# EAGLE board Street_Fighter_v1.2 (EAGLE 7.5.0)
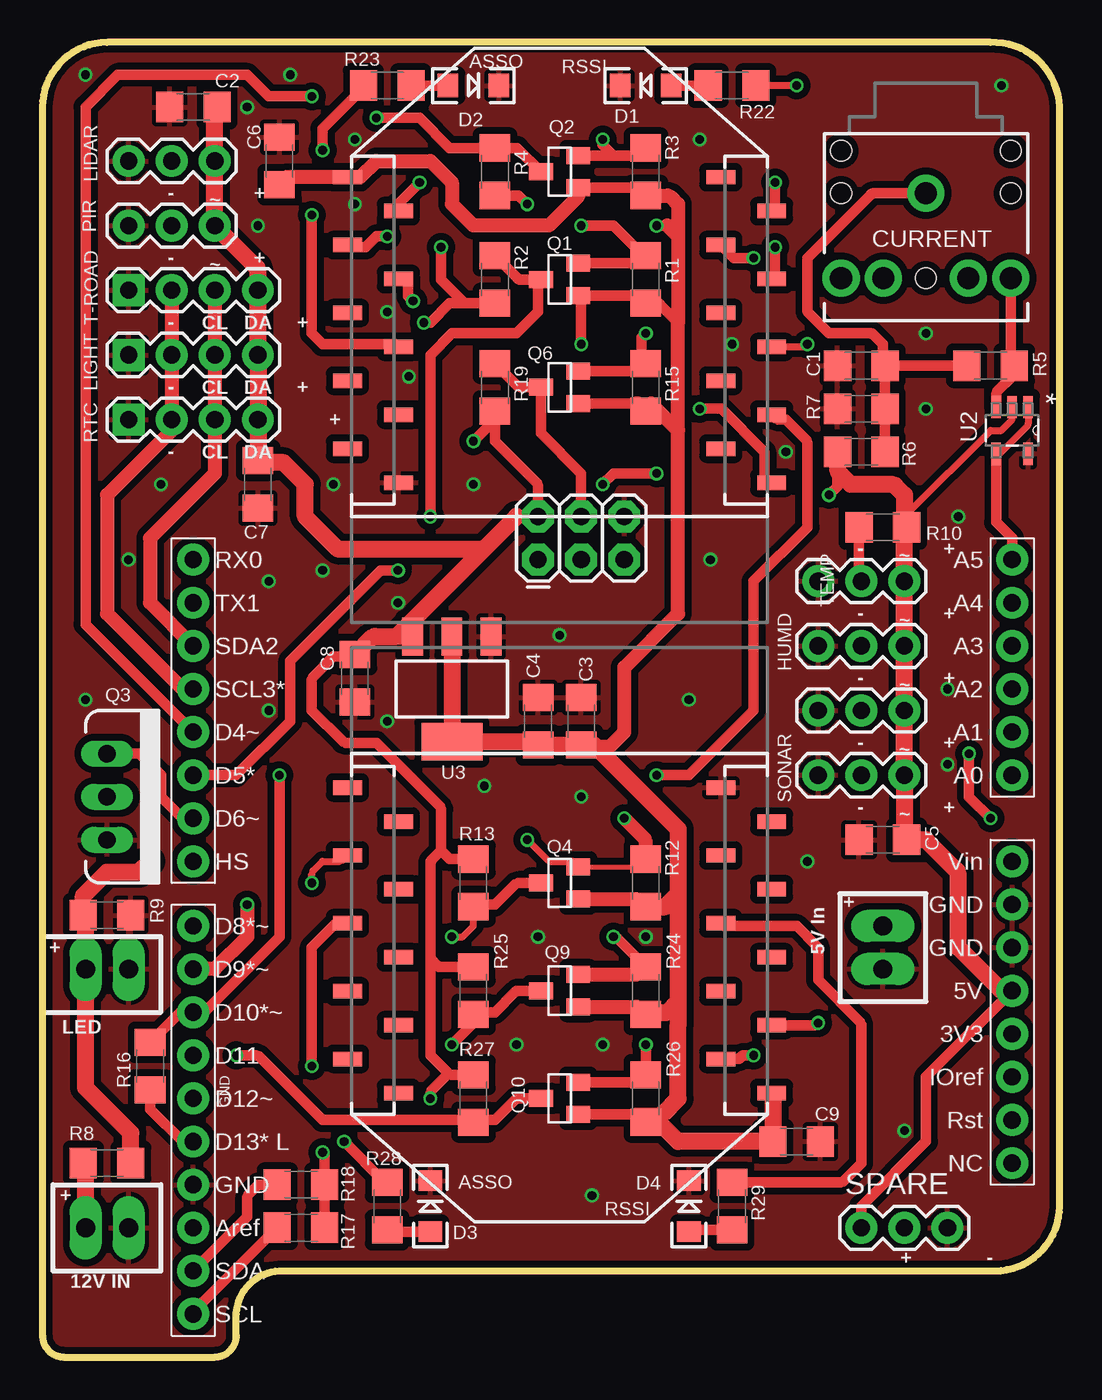
[diagram p0: board, top side]
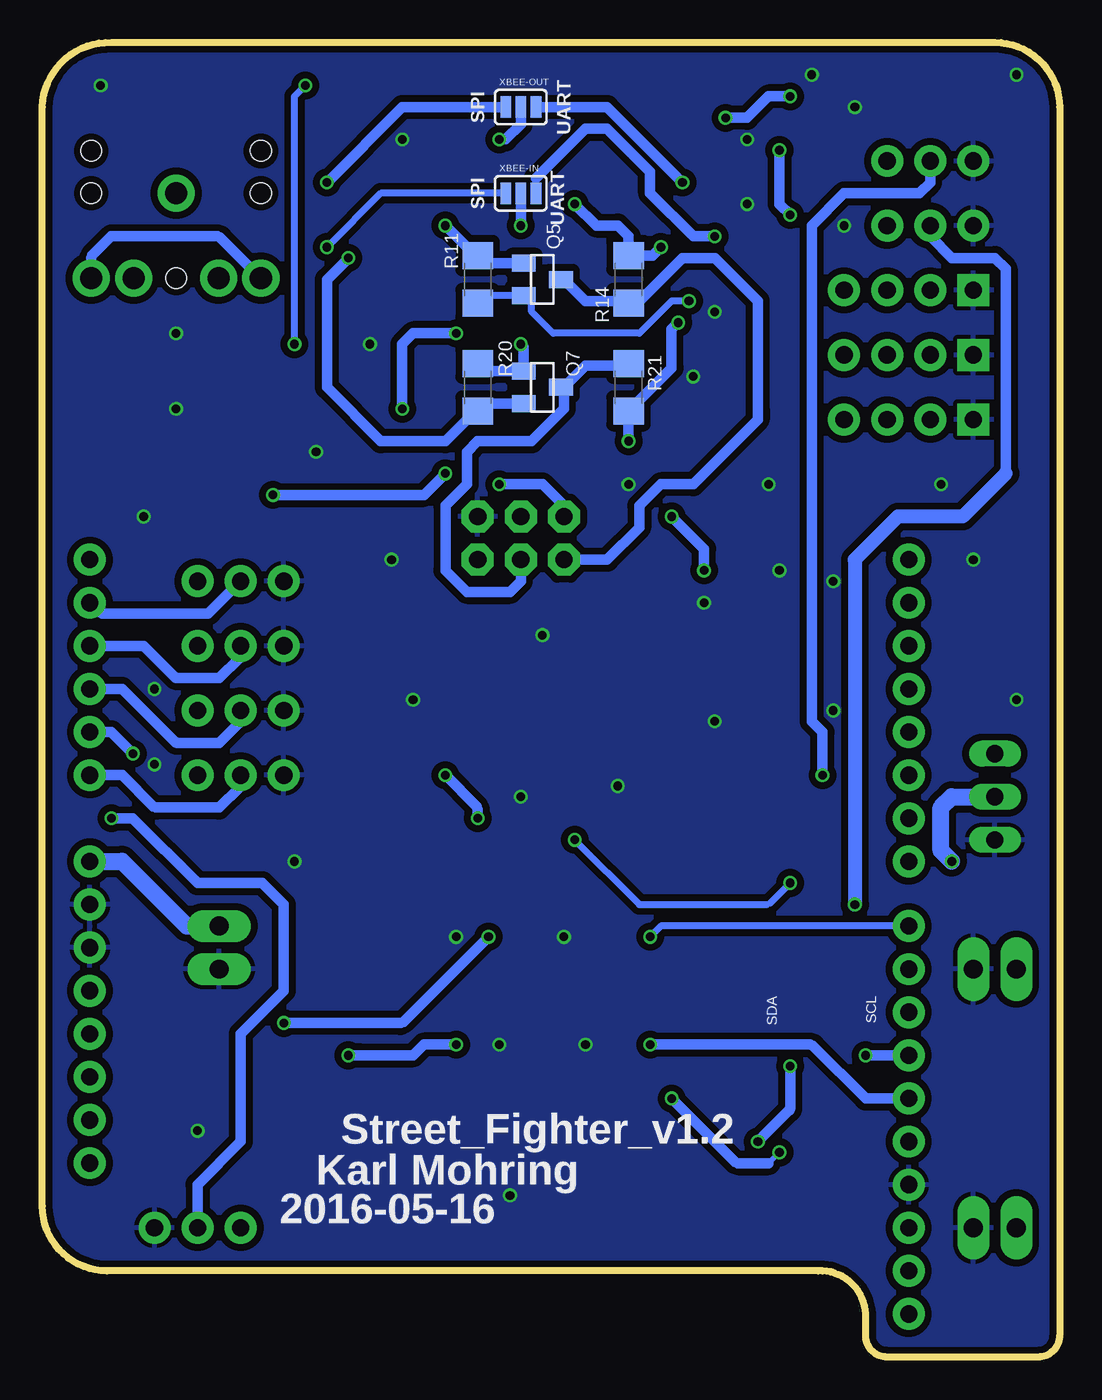
[diagram p1: board, bottom side, seen from below]

Size 59.94 x 77.47 mm. Coordinates in mm from the lower left corner, seen from the top.
Outline: 10.16,0 arc90 11.43,1.27 11.43,2.54 arc-90 14.22,5.08 56.13,5.08 arc90 59.94,8.89 59.94,73.66 arc90 55.88,77.47 3.81,77.47 arc90 0,73.66 0,1.27 arc90 1.27,0 10.16,0
Copper layers (1*16): Top 0.035mm / dielectric 1.5mm / Bottom 0.035mm
Design rules "ITEADstudio_DRC": minimum track width 6mil, minimum drill 12mil, track to track 6mil, track to pad 6mil, pad to pad 6mil, via to via 6mil, smd to smd 0mil, copper to edge 10mil, drill to drill 10mil, minimum pad ring 10mil, minimum via ring 6mil, stop-mask expansion 2mil, vias tented up to drill 100mil, thermal gap 10mil

## Footprints (pad centres in the part's own frame; a part is rotated, then mirrored left to right if it is on the bottom)
1206 = smd 1.6 x 1.8: 1 -1.4,0; 2 1.4,0
AUDIO-JACK = drill 1.3 pad 2.184: RING 5,5; RSH 5,2.5; SLEEVE 0,0; TIP 5,-5; TSH 5,-2.5 | hole 1.2: 0,5; -2.5,5; -2.5,-5; 0,-5; 5,0
LED-1206 = smd 1.2 x 1.4: A -1.5,0; C 1.5,0
1X03 = drill 1.016 pad 1.88: 1 0,0; 2 2.54,0; 3 5.08,0
2X3 = drill 1.016 pad 1.88 octagon: 1 0,0; 2 0,2.54; 3 2.54,0; 4 2.54,2.54; 5 5.08,0; 6 5.08,2.54
1X02_LONGPADS = drill 1.118 pad 1.88 long: 1 0,0; 2 2.54,0
1X04 = drill 1.016 pad 1.88 square: 1 0,0 | drill 1.016 pad 1.88: 2 2.54,0; 3 5.08,0; 4 7.62,0
SOT23 = smd 1 x 1.4: 1 -0.95,-1.1; 2 0.95,-1.1; 3 0,1.1
TO220V = drill 1.016 long: 1 -2.54,0; 2 0,0; 3 2.54,0
DUEMILANOVE_VIAS = drill 1.016 pad 1.88: 0 2.54,41.91; 1 2.54,39.37; 2 2.54,36.83; 2@1 2.54,0; 3 2.54,34.29; 3@1 2.54,-2.54; 3V3 50.8,13.97; 5 2.54,29.21; 5V 50.8,16.51; 6 2.54,26.67; 7 2.54,24.13; 8 2.54,20.32; 9 2.54,17.78; 10 2.54,15.24; 11 2.54,12.7; 12 2.54,10.16; 13 2.54,7.62; A0 50.8,29.21; A1 50.8,31.75; A2 50.8,34.29; A3 50.8,36.83; A4 50.8,39.37; A5 50.8,41.91; AREF 2.54,2.54; D4 2.54,31.75; GND 2.54,5.08; GND@0 50.8,19.05; GND@1 50.8,21.59; IOREF 50.8,11.43; NC 50.8,6.35; RESET 50.8,8.89; VIN 50.8,24.13
SOT95P270X145-5N = smd 1.321 x 0.559: 1 -1.372,0.94; 2 -1.372,0; 3 -1.372,-0.94; 4 1.372,-0.94; 5 1.372,0.94
SOT223 = smd 1.219 x 2.235: 1 -2.311,-3.099; 2 0,-3.099; 3 2.311,-3.099 | smd 3.6 x 2.2: 4 0,3.099
XBEE-SMD = smd 1.7 x 0.85: 1 -12.5,20; 2 -9.5,18; 3 -12.5,16; 4 -9.5,14; 5 -12.5,12; 6 -9.5,10; 7 -12.5,8; 8 -9.5,6; 9 -12.5,4; 10 -9.5,2; 11 12.5,2; 12 9.5,4; 13 12.5,6; 14 9.5,8; 15 12.5,10; 16 9.5,12; 17 12.5,14; 18 9.5,16; 19 12.5,18; 20 9.5,20
SJ_3 = smd 0.635 x 1.27: 1 -0.889,0; 2 0,0; 3 0.889,0

## Placement (x,y rotation side)
C1  10uF  [1206]  48.26,58.42 0 top
C2  10uF  [1206]  8.89,73.66 0 top
C3  10uF  [1206]  31.75,37.47 270 top
C4  0.1uF  [1206]  29.21,37.47 270 top
C5  10uF  [1206]  49.53,30.48 0 top
C6  10uF  [1206]  13.97,70.48 270 top
C7  10uF  [1206]  12.7,51.44 90 top
C8  10uF  [1206]  18.41,40.01 90 top
C9  10uF  [1206]  44.45,12.7 180 top
CURRENT  3.5mm Jack  [AUDIO-JACK]  52.07,68.58 270 top
D1  RED  [LED-1206]  35.56,74.93 180 top
D2  RED  [LED-1206]  25.4,74.93 0 top
D3  RED  [LED-1206]  22.86,8.89 90 top
D4  RED  [LED-1206]  38.1,8.89 90 top
DS18B20  TMP36  [1X03]  45.72,45.72 0 top
HUMD  HIH-4030  [1X03]  45.72,41.91 0 top
J1  FEMALE 2x3  [2X3]  29.21,46.99 0 top
JP2  LED Control  [1X02_LONGPADS]  5.08,22.86 180 top
JP3  Power input  [1X02_LONGPADS]  49.53,22.86 90 top
JP4  LED-Reference  [1X02_LONGPADS]  5.08,7.62 180 top
LIDAR  LidarLite  [1X03]  5.08,70.48 0 top
LIGHT  BH1750FVI  [1X04]  5.08,59.05 0 top
PIR  MOTION  [1X03]  5.08,66.67 0 top
Q1  BSS138  [SOT23]  30.48,63.5 90 top
Q2  BSS138  [SOT23]  30.48,69.85 90 top
Q3  FQP30N06L  [TO220V]  3.81,33.02 270 top
Q4  BSS138  [SOT23]  30.48,27.94 90 top
Q5  BSS138  [SOT23]  30.48,63.5 270 bottom
Q6  BSS138  [SOT23]  30.48,57.15 90 top
Q7  BSS138  [SOT23]  30.48,57.15 270 bottom
Q9  BSS138  [SOT23]  30.48,21.59 90 top
Q10  BSS138  [SOT23]  30.48,15.24 90 top
R1  4.7K  [1206]  35.56,63.5 270 top
R2  4.7K  [1206]  26.67,63.5 270 top
R3  4.7K  [1206]  35.56,69.85 270 top
R4  4.7K  [1206]  26.67,69.85 270 top
R5  2K2  [1206]  55.88,58.42 0 top
R6  75K  [1206]  48.26,53.34 180 top
R7  75K  [1206]  48.26,55.88 0 top
R8  15K  [1206]  3.81,11.43 180 top
R9  75K  [1206]  3.81,26.04 180 top
R10  4.7K  [1206]  49.53,48.9 0 top
R11  4.7K  [1206]  34.29,63.5 90 bottom
R12  4.7K  [1206]  35.56,27.94 270 top
R13  4.7K  [1206]  25.4,27.94 90 top
R14  4.7K  [1206]  25.4,63.5 90 bottom
R15  4.7K  [1206]  35.56,57.15 270 top
R16  1K  [1206]  6.35,17.14 90 top
R17  4K7  [1206]  15.24,7.62 0 top
R18  4K7  [1206]  15.24,10.16 0 top
R19  4.7K  [1206]  26.67,57.15 270 top
R20  4.7K  [1206]  34.29,57.15 90 bottom
R21  4.7K  [1206]  25.4,57.15 270 bottom
R22  1K  [1206]  40.64,74.93 180 top
R23  1K  [1206]  20.32,74.93 0 top
R24  4.7K  [1206]  35.56,21.59 270 top
R25  4.7K  [1206]  25.4,21.59 90 top
R26  4.7K  [1206]  35.56,15.24 270 top
R27  4.7K  [1206]  25.4,15.24 90 top
R28  1K  [1206]  20.32,8.89 270 top
R29  1K  [1206]  40.64,8.89 270 top
RTC  DC1307  [1X04]  5.08,55.24 0 top
SONAR  MOTION  [1X03]  45.72,34.29 0 top
SOUND  MIC  [1X03]  45.72,38.1 0 top
SPARE  A1  [1X03]  53.34,7.62 180 top
T-ROAD  MLX90614-ACF  [1X04]  5.08,62.87 0 top
U1  ARDUINO_YUN_SHIELDYUN  [DUEMILANOVE_VIAS]  6.35,5.08 0 top
U2  MCP6231RT-E/OT  [SOT95P270X145-5N]  57.15,54.61 270 top
U3  LM1117-3.3  [SOT223]  24.13,39.37 180 top
XBEE  XBEE-2B3  [XBEE-SMD]  30.48,49.53 0 top
XBEE1  XBEE-2B3  [XBEE-SMD]  30.48,35.56 180 top
XBEE-IN  [SJ_3]  31.75,68.58 0 bottom
XBEE-OUT  [SJ_3]  31.75,73.66 0 bottom

## Library data of the parts
C1-C9 = SparkFun-Capacitors; PROD_ID: CAP-10057
CURRENT DS18B20 HUMD JP2-JP4 LIDAR LIGHT PIR RTC SONAR SOUND SPARE T-ROAD = SparkFun-Connectors
D1-D4 = SparkFun-LED; PROD_ID: DIO-09912
J1 = SparkFun-Connectors; PROD_ID: CONN-11566
Q1 Q2 Q4-Q7 Q9 Q10 = SparkFun-DiscreteSemi; PROD_ID: TRANS-08345
Q3 = SparkFun-DiscreteSemi; PROD_ID: TRANS-10060
R1-R29 = SparkFun-Passives
U1 = SparkFun-Boards
U2 = Microchip_By_element14_Batch_1; DESCRIPTION: OP AMP; MPN: MCP6231RT-E/OT; OC_FARNELL: 1840878; OC_NEWARK: 84R5186; PACKAGE: SOT-5; SUPPLIER: Microchip
U3 = SparkFun-PowerIC; PROD_ID: VREG-08170
XBEE XBEE1 = SparkFun-RF; PROD_ID: CONN-09042
XBEE-IN XBEE-OUT = SparkFun-Retired

## Nets
3V3: U1.3V3
+3V3: C3.2 C4.2 C6.2 C9.2 Q1.1 Q2.1 Q4.1 Q5.1 Q6.1 Q7.1 Q9.1 Q10.1 R1.2 R3.2 R11.2 R12.2 R15.2 R20.2 R24.2 R26.2 U3.2 U3.4 XBEE1.1 XBEE.1
+5V: C2.2 C5.2 C7.2 C8.2 DS18B20.3 HUMD.3 J1.2 LIDAR.3 LIGHT.4 PIR.3 R2.2 R4.2 R6.2 R10.2 R13.2 R14.2 R17.2 R18.2 R19.2 R21.2 R25.2 R27.2 RTC.4 SONAR.3 SOUND.3 SPARE.3 T-ROAD.4 U1.5V U2.2 U3.3
+12V: JP4.2 R8.2
CURRENT: U1.A5 U2.1 U2.4
GND: C1.1 C2.1 C3.1 C4.1 C5.1 C6.1 C7.1 C8.1 C9.1 D1.C D2.C D3.C D4.C DS18B20.1 HUMD.1 J1.6 JP2.1 JP3.1 JP4.1 LIDAR.1 LIGHT.1 PIR.1 Q3.3 R7.1 R9.1 RTC.1 SONAR.1 SOUND.1 SPARE.1 T-ROAD.1 U1.GND U1.GND@0 U1.GND@1 U2.5 U3.1 XBEE1.10 XBEE.10
HANDSHAKE: U1.7
HUMIDITY: HUMD.2 U1.A3
LED-CONTROL: Q3.1 U1.6
LED-CONTROL-OUT: JP2.2 Q3.2 R8.1 R9.2
LIDAR-PWM: LIDAR.2 R16.2 U1.10
LIDAR-TRIG: R16.1 U1.13
MIC: SOUND.2 U1.A2
MISO: J1.1 Q5.3 R14.1
MOSI: J1.4 Q6.3 R19.1
MOTION: PIR.2 U1.9
N$1: D1.A R22.2
N$2: CURRENT.RING CURRENT.TIP R5.2 U2.3
N$3: D2.A R23.2
N$4: C1.2 CURRENT.SLEEVE R5.1 R6.1 R7.2
N$5: D3.A R28.2
N$6: D4.A R29.2
RST: J1.5
RX-XB: Q2.3 R4.1 U1.D4
RX-XB2: Q10.3 R27.1 U1.11
RX-YUN: U1.0
SCK: J1.3 Q7.3 R21.1
SCL: R17.1 U1.3@1
SCL@1: LIGHT.2 RTC.2 T-ROAD.2 U1.3
SDA: R18.1 U1.2@1
SDA@1: LIGHT.3 RTC.3 T-ROAD.3 U1.2
SONAR-PULSEIN: SONAR.2 U1.A0
SPARE: SPARE.2 U1.A1
TEMP: DS18B20.2 R10.1 U1.A4
TX-XB: Q1.3 R2.1 U1.5
TX-XB2: Q9.3 R25.1 U1.12
TX-YUN: U1.1
V+: JP3.2 U1.VIN
XB2-ASSO: R28.1 XBEE1.15
XB2-DIN: Q9.2 R24.1 XBEE1.3
XB2-DOUT: Q10.2 R26.1 XBEE1.2
XB2-RSSI: R29.1 XBEE1.6
XB-ASSO: R22.1 XBEE.15
XB-ATTN: XBEE-OUT.1 XBEE.19
XB-DIN: XBEE-IN.3 XBEE.3
XB-DOUT: XBEE-OUT.3 XBEE.2
XB-MISO: Q5.2 R11.1 XBEE.4
XB-MOSI: Q6.2 R15.1 XBEE.11
XB-RSSI: R23.1 XBEE.6
XB-RX3V: Q2.2 R3.1 XBEE-OUT.2
XB-SCK: Q7.2 R20.1 XBEE.18
XB-SLEEP: Q4.3 R13.1 U1.8
XB-SLEEP3V: Q4.2 R12.1 XBEE1.13 XBEE.13
XB-SS: XBEE-IN.1 XBEE.17
XB-TX3V: Q1.2 R1.1 XBEE-IN.2

## Tracks (layer width: path | path; a pad name or v marks a point on that pad's centre or on a via)
+3V3  (via drill 0.51)
  Top 0.305: 35.01,26.99 arc-45 35.18,26.92 R12.2 | 35.01,20.64 arc-45 35.18,20.57 R24.2 35.62,20.25 arc-45 35.8,20.32 | 35.01,14.29 arc-45 35.18,14.22 R26.2 | 28.9,36.27 arc-45 29.08,36.2 C4.2 | 35.18,56.13 R15.2 | 35.01,62.55 arc-45 35.18,62.48 R1.2 | XBEE1.1 arc-45 43.05,15.39 | 36.4,13.77 arc45 36.22,13.84 | 36.41,14.29 arc45 36.59,14.36 | 37.39,24.71 arc-45 37.47,24.53 | 31.75,62.38 Q1.1 | 14.41,69.53 C6.2
  Top 0.61: Q10.1 35.01,14.29 | R1.2 36.22,62.1 arc-45 36.4,62.03 37.47,60.96 | 36.85,68.45 arc-45 37.03,68.38 | Q6.1 35.01,56.2 35.88,56.2 | Q1.1 35.01,62.55 | v36.2,66.67 36.83,66.67 | Q2.1 35.11,68.9 R3.2 | 33.52,36.06 C3.2 32.52,36.06 | v31.75,59.69 31.75,62.38 | XBEE.1 18.73,69.53
  Top 0.813: Q4.1 35.01,26.99 | Q9.1 35.01,20.64 | R3.2 36.85,68.45 | 37.03,68.38 37.47,67.94 37.47,66.04 | 37.47,66.04 37.47,60.96 37.47,54.61 | 35.01,56.2 arc-45 35.18,56.13 | 36.22,13.84 R26.2 | 35.01,14.29 36.41,14.29 | 37.47,19.58 arc45 37.39,19.76 | 37.47,54.61 37.47,43.81 34.29,40.64 34.29,36.83 33.52,36.06 | 35.88,56.2 37.47,54.61 | 36.83,66.67 37.47,66.04 | Q2.1 31.58,68.41 29.84,66.67 25.4,66.67 24.13,67.94 24.13,69.22 22.86,70.48 19.68,70.48 18.73,69.53 | XBEE.1 14.41,69.53
  Top 1.016: U3.2 U3.4 28.9,36.27 | C4.2 C3.2 | 43.05,15.39 C9.2 37.47,12.7 36.4,13.77 | 36.59,14.36 37.47,15.24 37.47,19.58 37.47,20.95 | 37.47,20.95 37.47,24.53 37.47,27.3 | 32.52,36.06 37.47,31.11 37.47,27.3 | 35.8,20.32 36.83,20.32 37.47,20.95 | R12.2 36.7,26.54 37.47,27.3
  Bottom 0.305: 33.84,64.45 R11.2 | 33.84,58.1 R20.2
  Bottom 0.61: R11.2 34.42,64.9 v36.2,66.67 | Q5.1 33.84,64.45 | 33.84,58.1 Q7.1 31.58,59.52 v31.75,59.69
+5V  (via drill 0.51)
  Top 0.305: 10.23,73.6 C2.2 | 12.7,64.03 arc45 12.63,64.21 | RTC.4 12.7,52.94 arc45 12.77,52.76 C7.2 | 29.14,51.51 arc-45 29.21,51.33 29.21,51.44 26.67,53.98 26.67,55.88 | 25.93,47.62 arc45 26.11,47.7 | 19.58,42.47 arc45 19.4,42.39 | 56.62,21.59 arc-45 56.44,21.66 | 53.98,28.47 arc45 53.9,28.65 | 50.8,30.71 arc45 50.87,30.54 C5.2 | 50.8,48.66 arc-45 50.87,48.84 R10.2 | R10.2 50.93,49.55 arc-45 51,49.73 | 50.06,51.44 arc-45 50.24,51.36 | 50.8,49.13 arc45 50.87,48.95 R10.2 | 23.5,32.28 arc45 23.42,32.46 | 17.89,36.2 arc-45 17.71,36.27 | 15.88,39.9 arc-45 15.95,40.08 | 18.36,41.35 C8.2 | 24.11,16.64 arc-45 23.93,16.71 | 22.93,15.72 arc45 22.86,15.54 | 16.57,12.01 arc-45 16.64,11.83 | 24.77,62.23 26.54,62.23 R2.2 | R19.2 26.67,55.24
  Top 0.406: 51,49.73 55.88,54.61 56.52,54.61 57.15,55.24 U2.2
  Top 0.61: 29.14,51.51 26.67,53.98 R19.2 | 26.11,47.7 27.94,49.53 J1.2 29.21,51.33 | 46.93,52.13 arc-45 46.86,52.3 46.86,51.3 v46.35,50.8 | R13.2 24.11,29.34 arc-45 23.93,29.41 23.5,29.84 | 23.5,29.84 23.5,32.28 | 23.42,32.46 19.68,36.2 17.89,36.2 | 17.71,36.27 15.88,38.1 15.88,39.9 | 15.95,40.08 17.14,41.27 18.18,41.27 | R25.2 23.47,22.99 arc-45 23.29,23.06 22.86,23.5 | 22.86,23.5 22.86,29.11 arc-45 22.93,29.28 23.5,29.84 | R27.2 24.11,16.64 | 22.86,23.5 22.86,17.78 23.93,16.71 22.93,15.72 | 22.86,15.54 v22.86,15.24 | v16.51,12.06 16.57,12.01 | 16.64,11.83 R18.2 R17.2 | R4.2 28.07,68.45 v28.57,67.94 | v23.5,65.41 23.5,63.5 24.77,62.23 | 26.67,55.24 v25.4,53.98 | R2.2 24,62.1 22.86,60.96 v22.48,60.96 | v36.2,52.07 33.66,52.07 v33.02,51.44 | SPARE.3 48.26,8.89 52.07,12.7 52.07,16.51 U1.5V
  Top 1.016: 10.23,73.6 arc45 10.16,73.42 LIDAR.3 PIR.3 12.63,64.21 | 12.7,64.03 T-ROAD.4 LIGHT.4 RTC.4 C7.2 | C7.2 12.7,52.7 | 25.93,47.62 17.4,47.62 15.49,49.53 15.49,51.44 14.22,52.7 12.83,52.7 C7.2 | U3.3 20.88,42.47 | 19.4,42.39 C8.2 | U1.5V 56.62,21.59 | 56.44,21.66 53.98,24.13 53.98,28.47 | 53.9,28.65 52.07,30.48 C5.2 | 50.8,30.71 SONAR.3 SOUND.3 HUMD.3 DS18B20.3 50.8,48.66 | R6.2 46.86,52.3 | 46.93,52.13 47.62,51.44 50.06,51.44 | 50.24,51.36 50.8,50.8 50.8,49.13 | 18.18,41.27 arc45 18.36,41.35 | 19.58,42.47 20.88,42.47 | 20.88,42.47 27.94,49.53
  Bottom 0.254: 29.21,50.16 J1.2
  Bottom 0.305: 19.12,11.5 arc-45 18.95,11.43 | 17.14,11.43 v16.51,12.06
  Bottom 0.61: v22.86,15.24 19.12,11.5 | 18.95,11.43 17.14,11.43 | v28.57,67.94 27.3,66.67 26.04,66.67 25.4,66.04 R14.2 24,64.9 v23.5,65.41 | v25.4,53.98 R21.2 22.86,58.29 22.86,60.58 v22.48,60.96 | v46.35,50.8 37.47,50.8 v36.2,52.07 | v33.02,51.44 30.48,51.44 29.21,50.16
+12V
  Top 1.016: JP4.2 2.54,11.3 R8.2
CURRENT
  Top 0.305: U2.4 56.31,53.24
  Top 0.406: U2.1 58.09,55.02 arc-45 58.02,54.84 56.49,53.31 arc-45 56.31,53.24
  Top 0.61: U2.4 56.21,49.2 57.15,48.26 U1.A5
GND  (via drill 0.51)
  other vias: 2.54,38.73 6.99,51.44 2.54,75.56 14.61,75.56 25.4,51.44 39.37,46.99 43.81,53.34 52.07,60.33 52.07,55.88 53.98,49.53 53.34,39.37 53.34,34.92 27.94,18.41 29.21,24.77 31.75,33.02 26.04,33.66 33.02,18.41 20.95,44.45 5.08,46.99 18.41,71.75 40.64,59.69 38.73,71.75 18.41,67.94 20.32,61.59 20.32,37.47 16.51,46.35 13.34,38.1 12.7,66.67 12.06,73.66 13.34,45.72 45.09,29.21 50.8,13.34 32.38,9.53 56.52,74.93 35.56,24.77 17.14,51.44 21.59,57.78 30.48,42.55 38.1,38.73
  pour Top (isolate 0.406): -3.17,81.92 62.87,81.92 62.87,-3.17 -3.17,-3.17
  pour Bottom (isolate 0.406): -2.54,80.64 61.59,80.64 61.59,-1.91 -2.54,-1.91
HUMIDITY
  Bottom 0.305: 48.26,41.38 arc45 48.33,41.2
  Bottom 0.61: HUMD.2 48.26,41.38 | 48.33,41.2 49.53,40.01 51.97,40.01 arc45 52.14,40.08 53.98,41.91 U1.A3
LED-CONTROL
  Top 0.61: Q3.1 5.71,35.56 6.99,34.29 6.99,33.02 8.26,31.75 U1.6
LED-CONTROL-OUT  (via drill 0.51)
  Top 1.016: R8.1 5.21,13.21 2.54,15.88 JP2.2 2.54,25.91 R9.2 2.41,27.18 3.81,28.57 5.71,28.57 v6.35,29.21
  Bottom 1.016: v6.35,29.21 6.99,29.84 6.99,32.38 6.35,33.02 Q3.2
LIDAR-PWM  (via drill 0.51)
  Top 0.305: U1.10 8.12,20.32
  Top 0.61: 8.12,20.32 R16.2 | U1.10 9.53,20.32 13.97,24.77 v13.97,34.29
  Bottom 0.61: v13.97,34.29 13.97,36.83 14.61,37.47 14.61,66.67 12.7,68.58 8.26,68.58 7.62,69.22 LIDAR.2
LIDAR-TRIG
  Top 0.61: U1.13 8.26,12.7 6.35,14.61 R16.1
MIC
  Bottom 0.61: SOUND.2 48.26,37.57 arc45 48.33,37.39 49.53,36.2 51.97,36.2 arc45 52.14,36.27 55.24,39.37 U1.A2
MISO
  Bottom 0.305: 25.53,62.23 R14.1 25.27,62.23
  Bottom 0.406: 24.77,62.23 25.27,62.23
  Bottom 0.61: Q5.3 29.21,63.5 27.94,62.23 25.53,62.23 | J1.1 26.67,46.99 24.77,48.9 24.77,50.16 23.5,51.44 21.59,51.44 17.78,55.24 17.78,55.88 17.78,62.23 20.32,64.77 22.23,64.77 24.77,62.23
MOSI
  Top 0.305: 28.18,57.15 arc-45 28,57.22
  Top 0.61: 28.18,57.15 Q6.3 29.38,54.44 31.75,52.07 J1.4 | 28,57.22 R19.1
MOTION  (via drill 0.51)
  Top 0.813: v12.06,26.67 12.06,24.77 10.16,22.86 U1.9
  Bottom 0.61: PIR.2 7.62,66.04 6.35,64.77 3.81,64.77 3.17,64.14 3.17,52.07
  Bottom 0.813: 3.17,52.07 5.71,49.53 9.53,49.53 12.06,46.99 v12.06,26.67
N$1
  Top 0.61: R22.2 D1.A
N$2
  Top 0.305: 57.07,58.73 arc45 57.14,58.56 R5.2 57.22,58.36 arc45 57.15,58.19 57.15,57.78 | 56.21,56.74 arc-45 56.28,56.92
  Top 0.61: CURRENT.RING 57.07,58.73 | U2.3 56.21,56.74 | 56.28,56.92 57.15,57.78
  Bottom 0.305: 57.07,64.75 arc45 57,64.92 | 49.63,66.04 arc45 49.46,65.97
  Bottom 0.61: CURRENT.RING 57.07,64.75 | 57,64.92 55.88,66.04 49.63,66.04 | 49.46,65.97 CURRENT.TIP
N$3
  Top 0.61: R23.2 D2.A
N$4
  Top 0.305: 49.53,58.66 arc45 49.6,58.48 C1.2 | R7.2 49.66,56.52 49.6,56.46 arc45 49.53,56.28 49.53,55.24 49.59,55.19 arc-45 49.66,55.01
  Top 0.61: CURRENT.SLEEVE 49,68.58 arc45 48.82,68.51 45.09,64.77 45.09,61.7 arc45 45.16,61.52 46.35,60.33 48.79,60.33 arc-45 48.97,60.25 49.53,59.69 49.53,58.66 | 49.66,56.52 C1.2 R5.1 | R6.1 49.66,55.01
N$5
  Top 0.305: R28.2 20.35,7.46 arc45 20.52,7.39
  Top 0.61: 20.52,7.39 D3.A
N$6
  Top 0.305: D4.A 38.13,7.42 arc-45 38.3,7.49
  Top 0.61: 38.3,7.49 R29.2
RX-XB  (via drill 0.51)
  Top 0.61: Q2.3 27.98,71.25 R4.1 24,71.25 22.23,73.03 v19.68,73.03 | U1.D4 2.54,43.18 2.54,73.66 4.45,75.56 12.06,75.56 13.34,74.3 v15.88,74.3
  Bottom 0.61: v15.88,74.3 17.14,74.3 18.41,73.03 v19.68,73.03
RX-XB2  (via drill 0.51)
  Top 0.305: 12.6,17.78 arc-45 12.77,17.71 | 25.16,13.97 arc-45 25.34,13.9 R27.1 25.46,13.9 arc-45 25.64,13.97
  Top 0.61: v11.43,17.78 12.6,17.78 | 12.77,17.71 16.51,13.97 25.16,13.97 | Q10.3 28.05,15.24 arc45 27.87,15.17 26.67,13.97 25.64,13.97
  Bottom 0.61: U1.11 v11.43,17.78
SCK
  Bottom 0.305: 29.21,57.15 Q7.3 29.21,56.98 | 25.53,58.42 R21.1
  Bottom 0.61: 29.21,57.15 27.94,58.42 25.53,58.42 | J1.3 31.75,45.72 32.38,45.09 34.92,45.09 36.2,46.35 36.2,50.16 34.92,51.44 34.92,53.34 34.29,53.98 31.11,53.98 29.21,55.88 29.21,56.98
SCL
  Top 0.305: U1.3@1 8.89,2.67
  Top 0.61: 8.89,2.67 R17.1
SCL@1
  Top 0.305: U1.3 8.26,39.37
  Top 0.813: T-ROAD.2 LIGHT.2 RTC.2 7.62,54.61 3.81,50.8 3.81,43.81 8.26,39.37
SDA
  Top 0.305: 12.06,9.42 arc-45 12.14,9.6
  Top 0.61: U1.2@1 12.06,8.26 12.06,9.42 | 12.14,9.6 12.7,10.16 R18.1
SDA@1
  Top 0.813: T-ROAD.3 LIGHT.3 RTC.3 10.16,52.07 6.35,48.26 6.35,44.45 U1.2
SONAR-PULSEIN
  Bottom 0.305: 48.26,33.76 arc45 48.33,33.58 | 53.23,32.38 arc45 53.41,32.46
  Bottom 0.61: SONAR.2 48.26,33.76 | 48.33,33.58 49.53,32.38 53.23,32.38 | 53.41,32.46 55.24,34.29 U1.A0
SPARE  (via drill 0.51)
  Top 0.61: v54.61,35.56 54.61,33.02 v55.88,31.75
  Bottom 0.61: U1.A1 55.88,36.83 v54.61,35.56 | v55.88,31.75 54.61,31.75 50.8,27.94 46.99,27.94 45.72,26.67 45.72,21.59 48.26,19.05 48.26,12.7 50.8,10.16 SPARE.2
TEMP
  Top 0.305: 48.2,45.78 arc-45 48.13,45.95
  Top 0.61: DS18B20.2 48.2,45.78 | 48.13,45.95 R10.1
  Bottom 0.305: 56.41,43.81 arc45 56.59,43.89
  Bottom 0.61: DS18B20.2 50.09,43.89 arc45 50.27,43.81 56.41,43.81 | 56.59,43.89 U1.A4
TX-XB  (via drill 0.51)
  Top 0.305: 29.21,63.33 Q1.3
  Top 0.61: Q1.3 28.18,63.5 arc-45 28,63.57 R2.1 | U1.5 11.43,34.29 14.61,37.47 14.61,41.02 19.94,46.35 v20.95,46.35 | v22.86,49.53 22.86,59.05 24.13,60.33 27.94,60.33 29.21,61.59 29.21,63.33
  Bottom 0.61: v20.95,46.35 20.95,47.62 v22.86,49.53
TX-XB2  (via drill 0.51)
  Top 0.305: 25.64,20.32 arc45 25.46,20.25 R25.1 25.4,19.79 arc-45 25.33,19.61
  Top 0.61: Q9.3 28.05,21.59 arc45 27.87,21.52 26.67,20.32 25.64,20.32 | 25.33,19.61 v24.13,18.41
  Bottom 0.305: 14.71,18.41 arc45 14.53,18.34
  Bottom 0.61: v24.13,18.41 14.71,18.41 | 14.53,18.34 11.43,15.24 U1.12
V+
  Bottom 1.016: U1.VIN 55.24,29.21 51.44,25.4 JP3.2
XB2-ASSO  (via drill 0.51)
  Top 0.305: R28.1 20.3,10.29 | 17.23,25.49 arc-45 17.41,25.56
  Top 0.61: 20.3,10.29 arc-45 20.12,10.36 v17.78,12.7 | v15.88,17.14 15.88,24.13 17.23,25.49 | 17.41,25.56 XBEE1.15
  Bottom 0.61: v17.78,12.7 15.95,14.53 arc-45 15.88,14.71 v15.88,17.14
XB2-DIN  (via drill 0.51)
  Top 0.305: 35.01,22.54 arc45 35.18,22.61 R24.1 | 33.68,24.77 v33.66,24.77 | 45.67,19.63 arc-45 45.49,19.56
  Top 0.61: R24.1 33.86,24.69 arc45 33.68,24.77 | v45.72,19.68 45.67,19.63 | 45.49,19.56 XBEE1.3
  Top 0.813: Q9.2 35.01,22.54
  Bottom 0.305: 38.66,19.76 arc45 38.84,19.68
  Bottom 0.61: v33.66,24.77 38.66,19.76 | 38.84,19.68 v45.72,19.68
XB2-DOUT  (via drill 0.51)
  Top 0.305: 35.01,16.19 arc45 35.18,16.26 R26.1
  Top 0.61: Q10.2 35.01,16.19 | R26.1 v35.56,18.41 | XBEE1.2 41.05,17.56 41.27,17.78 v41.91,17.78
  Bottom 0.61: v35.56,18.41 37.47,18.41 38.1,17.78 41.27,17.78 v41.91,17.78
XB2-RSSI
  Top 0.305: 47.02,10.29 arc45 47.19,10.36 | 48.26,19.58 arc45 48.19,19.76 | 45.72,24.02 arc45 45.65,24.2 | 40.07,25.47 XBEE1.6
  Top 0.61: R29.1 47.02,10.29 | 47.19,10.36 48.26,11.43 48.26,19.58 | 48.19,19.76 45.72,22.23 45.72,24.02 | 45.65,24.2 44.45,25.4 40.24,25.4 arc-45 40.07,25.47
XB-ASSO  (via drill 0.51)
  Top 0.406: XBEE.15 44.92,59.53 v45.09,59.69 | v44.45,74.93 R22.1
  Bottom 0.406: v45.09,59.69 45.09,74.3 v44.45,74.93
XB-ATTN  (via drill 0.51)
  Top 0.305: 43.18,67.73 XBEE.19
  Top 0.61: v43.18,69.22 43.18,67.73
  Bottom 0.61: XBEE-OUT.1 38.73,73.66 v43.18,69.22
XB-DIN  (via drill 0.51)
  Top 0.305: 18.11,65.41 XBEE.3
  Top 0.61: v20.32,66.04 19.68,66.04 19.05,65.41 18.11,65.41
  Bottom 0.406: XBEE-IN.3 30.86,69.47
  Bottom 0.61: 30.86,69.47 27.94,72.39 26.67,72.39 24.13,69.85 24.13,68.58 21.59,66.04 v20.32,66.04
XB-DOUT  (via drill 0.51)
  Top 0.61: XBEE.2 20.98,67.97 v22.23,69.22
  Bottom 0.61: v22.23,69.22 26.67,73.66 XBEE-OUT.3
XB-MISO  (via drill 0.51)
  Top 0.305: XBEE.4 21.56,63.53
  Top 0.61: 21.56,63.53 21.56,62.51 v21.84,62.23
  Bottom 0.406: 33.91,62.48 arc45 33.73,62.55 Q5.2 31.11,62.09 31.11,61.59 29.84,60.33 24.77,60.33 22.86,62.23 v21.84,62.23
  Bottom 0.61: 33.91,62.48 R11.1
XB-MOSI  (via drill 0.51)
  Top 0.305: 35.13,58.1 arc45 35.31,58.17 35.56,58.42 R15.1 | 42.55,51.97 XBEE.11
  Top 0.61: Q6.2 35.13,58.1 | 35.31,58.17 35.31,60.08 v35.56,60.33 | v38.73,55.88 40.01,55.88 42.55,53.34 42.55,51.97
  Bottom 0.61: v35.56,60.33 38.1,60.33 38.73,59.69 v38.73,55.88
XB-RSSI  (via drill 0.51)
  Top 0.305: R23.1 18.92,74.8
  Top 0.61: 18.92,74.8 16.51,72.39 v16.51,71.12 | v15.88,67.31 15.88,60.33 16.51,59.69 20.82,59.69 XBEE.6
  Bottom 0.61: v16.51,71.12 16.51,67.94 v15.88,67.31
XB-RX3V  (via drill 0.51)
  Top 0.406: 35.11,70.8 R3.1
  Top 0.61: Q2.2 33.66,70.8 | 33.66,70.8 35.11,70.8 | v33.02,71.75 33.02,71.44 33.66,70.8
  Bottom 0.61: v33.02,71.75 32.64,71.75 31.75,72.64 XBEE-OUT.2
XB-SCK  (via drill 0.51)
  Top 0.61: v41.91,64.77 40.74,64.77 XBEE.18
  Bottom 0.305: 33.84,56.2 R20.1
  Bottom 0.61: Q7.2 33.84,56.2 33.97,56.2 36.2,53.98 40.01,53.98 43.18,57.15 43.18,63.5 v41.91,64.77
XB-SLEEP  (via drill 0.51)
  Top 0.305: 28.05,27.94 arc45 27.87,27.87 | 25.64,26.67 arc45 25.46,26.6 R13.1
  Top 0.406: v24.13,24.77 24.77,24.77 25.4,25.4 R13.1
  Top 0.61: Q4.3 28.05,27.94 | 27.87,27.87 26.67,26.67 25.64,26.67
  Bottom 0.406: U1.8 23.5,25.4 v24.13,24.77
XB-SLEEP3V  (via drill 0.51)
  Top 0.305: Q4.2 35.01,28.89 arc45 35.18,28.96 R12.1 | 29.95,29.21 arc-45 29.77,29.28 | 15.88,28.47 arc-45 15.95,28.65 | 17.52,29.21 arc45 17.7,29.28 | 35.56,30.38 arc45 35.49,30.55 | 43.37,55.24 arc-45 43.19,55.32
  Top 0.406: 29.77,29.28 v28.57,30.48 | v15.88,27.94 15.88,28.47 | 15.95,28.65 16.51,29.21 17.52,29.21 | 17.7,29.28 XBEE1.13 | 45.09,53.87 arc45 45.01,54.05 | 29.95,29.21 31.26,29.21 Q4.2
  Top 0.61: 45.09,53.87 45.09,48.9 41.91,45.72 41.91,38.1 38.1,34.29 v36.2,34.29 36.27,34.36 | 45.01,54.05 43.81,55.24 43.37,55.24 | 43.19,55.32 XBEE.13
  Top 0.813: R12.1 35.56,30.38 | 35.49,30.55 v34.29,31.75
  Bottom 0.305: 17.25,26.67 arc-45 17.07,26.74 | 34.29,32.28 arc-45 34.36,32.46
  Bottom 0.406: 17.25,26.67 24.77,26.67 v28.57,30.48 | 17.07,26.74 v15.88,27.94
  Bottom 0.61: v34.29,31.75 34.29,32.28 | 34.36,32.46 v36.2,34.29
XB-SS  (via drill 0.51)
  Top 0.305: 43.18,63.73 XBEE.17
  Top 0.61: v43.18,65.41 43.18,63.73
  Bottom 0.406: XBEE-IN.1 40.01,68.58 v43.18,65.41
XB-TX3V  (via drill 0.51)
  Top 0.305: Q1.2 35.01,64.45 arc45 35.18,64.52 | 35.13,64.45 arc45 35.31,64.52 35.56,64.77
  Top 0.61: 35.18,64.52 R1.1 | Q1.2 35.13,64.45 | 35.56,64.77 33.66,66.67 v31.75,66.67
  Bottom 0.61: v31.75,66.67 XBEE-IN.2

## Text on the board
bPlace: UART | SPI | SPI | UART
tNames: ASSO | RSSI | - | ~ | + | - | ~ | + | - | CL | DA | + | - | CL | DA | + | + | - | CL | DA | TEMP | - | ~ | + | - | ~ | + | - | ~ | + | - | ~ | + | - | ~ | + | + | + | 5V In | LED | GND | ASSO | + | RSSI | + | - | 12V IN
bNames: SCL | SDA | Karl Mohring | 2016-05-16